# Altium PCB ui_layout-v0.1.1.PcbDoc
Units mil, origin at the board's own origin, x right, y up, seen from the top; angles counter-clockwise.
Board outline 3940 x 1889.76 mil, 2 copper layers (Top Layer, Bottom Layer); 35 components, 47 nets, 127 pads, 34 vias.
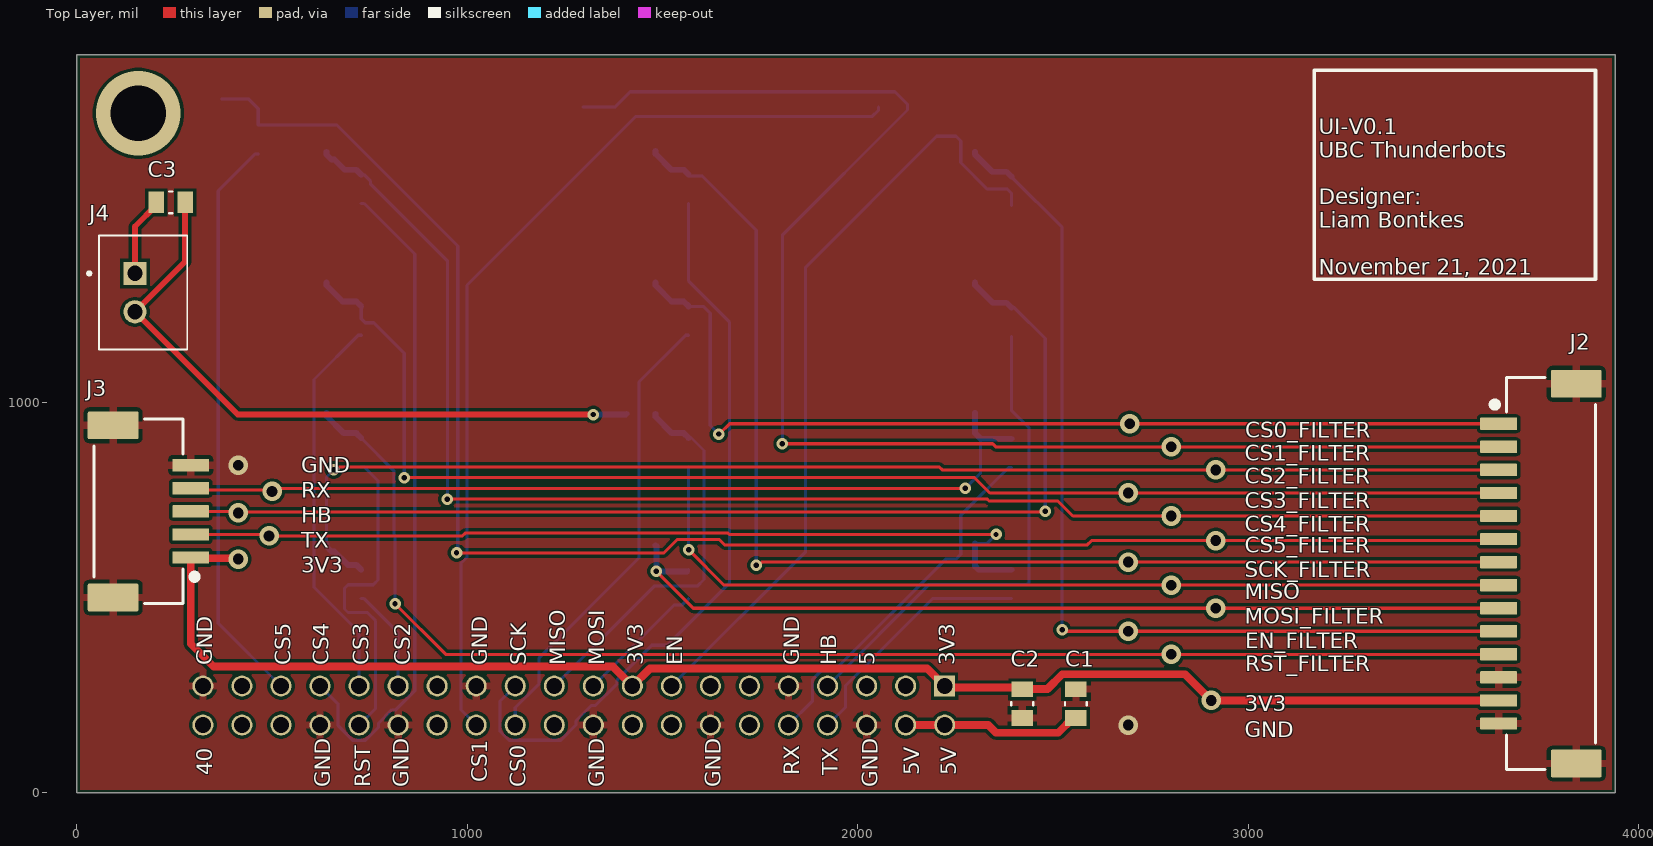
[diagram p0: Top Layer view]
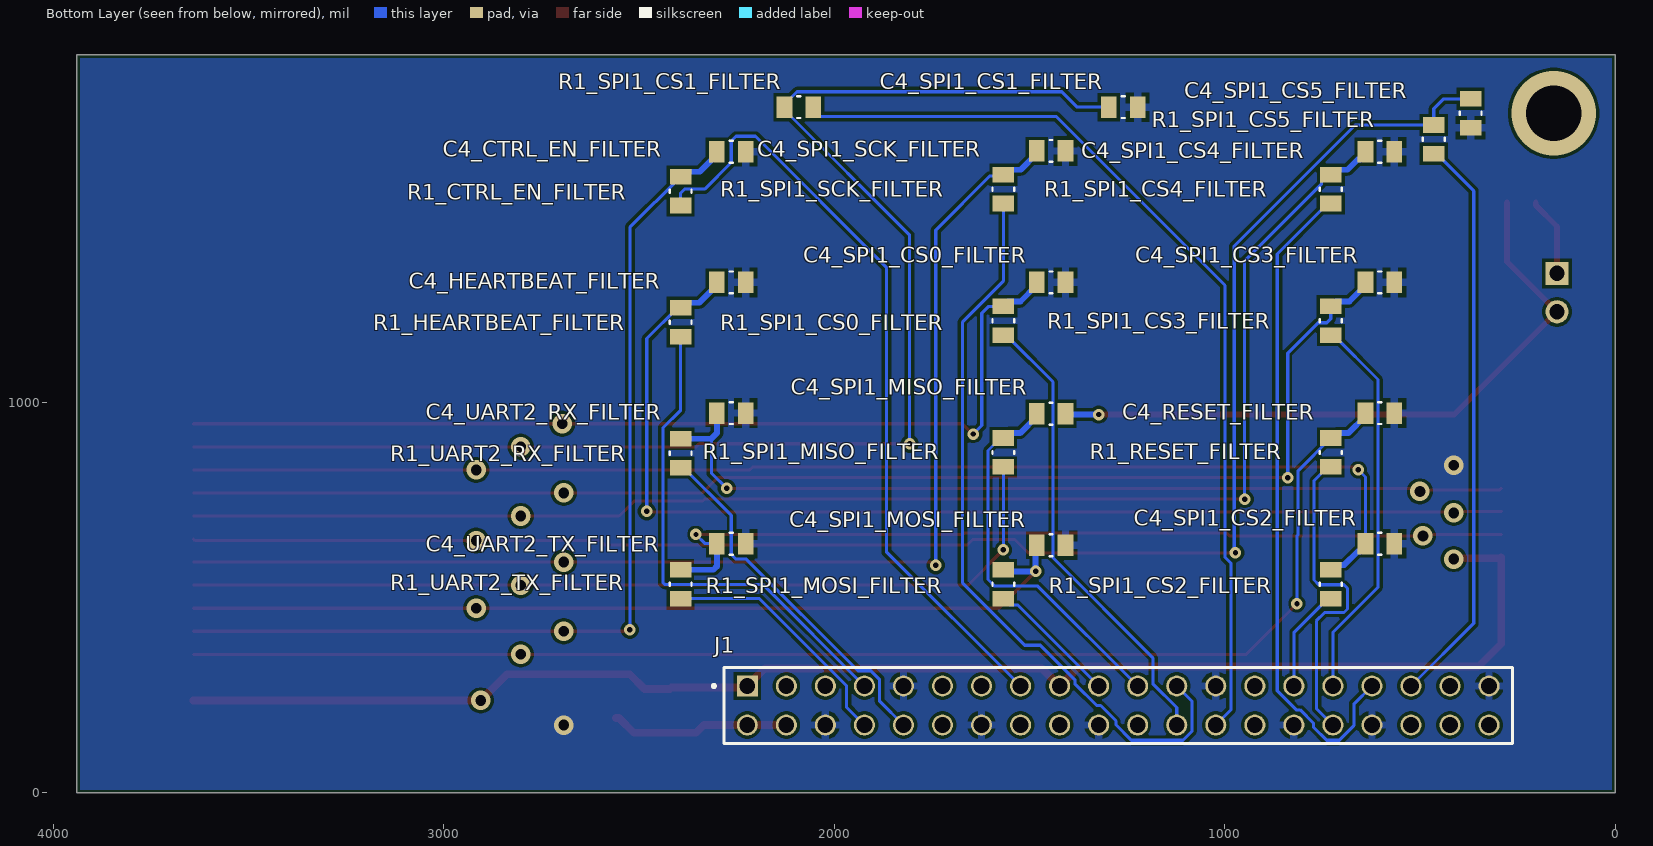
[diagram p1: Bottom Layer view, seen from below]

## Layer stack, top to bottom
Top Solder: solder mask 0.4, Solder Resist, Dk 3.5
Top Layer: signal copper 1.4
Dielectric 1: dielectric 12.6, FR-4, Dk 4.8
Bottom Layer: signal copper 1.4
Bottom Solder: solder mask 0.4, Solder Resist, Dk 3.5

## Board outline
0,0 0,1889.76 3940,1889.76 3940,0

## Design rules (kind name [scope] priority, off if disabled: settings)
BoardOutlineClearance [All] p1: gap=7.87 ignorepadtopadclearanceinfootprint=FALSE except(15.75: Arc-SplitBarrior Arc-SplitContinuation Track-SplitBarrior Track-SplitContinuation SMDPad-SplitBarrior SMDPad-SplitContinuation THPad-SplitBarrior THPad-SplitContinuation Via-SplitBarrior Via-SplitContinuation Fill-SplitBarrior Fill-SplitContinuation Poly-SplitBarrior Poly-SplitContinuation Region-SplitBarrior Region-SplitContinuation Text-SplitBarrior Text-SplitContinuation)
Clearance "Clearance Bottom Layer" [OnLayer('Bottom Layer')] p1: gap=8 ignorepadtopadclearanceinfootprint=TRUE except(10: Arc-Text Track-Text SMDPad-Text THPad-Text Via-Text Fill-Text Poly-Text Region-Text Text-Text)
Clearance "Clearance Top Layer" [OnLayer('Top Layer')] p2: gap=8 ignorepadtopadclearanceinfootprint=TRUE except(10: Arc-Text Track-Text SMDPad-Text THPad-Text Via-Text Fill-Text Poly-Text Region-Text Text-Text)
Clearance [All] p3: gap=7.87 ignorepadtopadclearanceinfootprint=TRUE except(3.5: Arc-Arc Arc-Track Arc-SMDPad Track-Track Track-SMDPad SMDPad-SMDPad; 5: Arc-Via Track-Via SMDPad-Via THPad-Via Via-Via; 10: Arc-Text Track-Text SMDPad-Text THPad-Text Via-Text Fill-Text Poly-Text Region-Text Text-Text)
HoleSize [All] p1: absolutevalues=TRUE maxlimit=248.03 minlimit=7.87 maxpercent=80.000 minpercent=20.000
MinimumAnnularRing [All] p1: minimumring=3
MinimumSolderMaskSliver [All] p1: minsoldermaskwidth=3.94
PolygonConnect PolygonConnect_1 [All] p1: thpad.connectstyle=Relief thpad.reliefconductorwidth=20 thpad.reliefentries=4 thpad.polygonreliefangle="90 Angle" thpad.airgapwidth=10 smdpad.connectstyle=Relief smdpad.reliefconductorwidth=20 smdpad.reliefentries=4 smdpad.polygonreliefangle="90 Angle" smdpad.airgapwidth=10 via.connectstyle=Direct via.reliefconductorwidth=20 via.reliefentries=4 via.polygonreliefangle="90 Angle" via.airgapwidth=10
RoomDefinition SPI1_CS1_FILTER [InComponentClass('SPI1_CS1_FILTER')] p1: confinementstyle=ConfineIn formatcopy=TRUE lockcomponents=FALSE outline 1181.1,1708.66 2169.29,1708.66 2169.29,1803.15 1181.1,1803.15
RoomDefinition SPI1_CS5_FILTER [InComponentClass('SPI1_CS5_FILTER')] p2: confinementstyle=ConfineIn formatcopy=TRUE lockcomponents=FALSE outline 322.83,1594.49 511.81,1594.49 511.81,1818.9 322.83,1818.9
RoomDefinition UART2_TX_FILTER [InComponentClass('UART2_TX_FILTER')] p3: confinementstyle=ConfineIn formatcopy=TRUE lockcomponents=FALSE outline 2185.04,456.69 2440.94,456.69 2440.94,685.04 2185.04,685.04
RoomDefinition UART2_RX_FILTER [InComponentClass('UART2_RX_FILTER')] p4: confinementstyle=ConfineIn formatcopy=TRUE lockcomponents=FALSE outline 2185.04,791.34 2440.94,791.34 2440.94,1019.68 2185.04,1019.68
RoomDefinition U_power [InComponentClass('U_power')] p5: confinementstyle=ConfineIn formatcopy=TRUE lockcomponents=FALSE outline 3.94,440.94 362.2,440.94 362.2,1559.06 3.94,1559.06
RoomDefinition U_motordriver [InComponentClass('U_motordriver')] p6: confinementstyle=ConfineIn formatcopy=TRUE lockcomponents=FALSE outline 3572.68,17.56 3572.68,1104.49 3927.32,1104.49 3927.32,17.56
RoomDefinition U_jetson-nano [InComponentClass('U_jetson-nano')] p7: confinementstyle=ConfineIn formatcopy=TRUE lockcomponents=FALSE outline 240.16,102.36 2606.3,102.36 2606.3,342.52 240.16,342.52
RoomDefinition SPI1_SCK_FILTER [InComponentClass('SPI1_SCK_FILTER')] p8: confinementstyle=ConfineIn formatcopy=TRUE lockcomponents=FALSE outline 1366.14,1468.5 1614.17,1468.5 1614.17,1692.91 1366.14,1692.91
RoomDefinition SPI1_MOSI_FILTER [InComponentClass('SPI1_MOSI_FILTER')] p9: confinementstyle=ConfineIn formatcopy=TRUE lockcomponents=FALSE outline 1366.14,456.69 1614.17,456.69 1614.17,681.1 1366.14,681.1
RoomDefinition SPI1_MISO_FILTER [InComponentClass('SPI1_MISO_FILTER')] p10: confinementstyle=ConfineIn formatcopy=TRUE lockcomponents=FALSE outline 1366.14,791.34 1614.17,791.34 1614.17,1019.68 1366.14,1019.68
RoomDefinition SPI1_CS4_FILTER [InComponentClass('SPI1_CS4_FILTER')] p11: confinementstyle=ConfineIn formatcopy=TRUE lockcomponents=FALSE outline 523.62,1468.5 775.59,1468.5 775.59,1688.98 523.62,1688.98
RoomDefinition SPI1_CS3_FILTER [InComponentClass('SPI1_CS3_FILTER')] p12: confinementstyle=ConfineIn formatcopy=TRUE lockcomponents=FALSE outline 523.62,1129.92 775.59,1129.92 775.59,1354.33 523.62,1354.33
RoomDefinition SPI1_CS2_FILTER [InComponentClass('SPI1_CS2_FILTER')] p13: confinementstyle=ConfineIn formatcopy=TRUE lockcomponents=FALSE outline 523.62,456.69 775.59,456.69 775.59,685.04 523.62,685.04
RoomDefinition SPI1_CS0_FILTER [InComponentClass('SPI1_CS0_FILTER')] p14: confinementstyle=ConfineIn formatcopy=TRUE lockcomponents=FALSE outline 1366.14,1129.92 1614.17,1129.92 1614.17,1354.33 1366.14,1354.33
RoomDefinition RESET_FILTER [InComponentClass('RESET_FILTER')] p15: confinementstyle=ConfineIn formatcopy=TRUE lockcomponents=FALSE outline 523.62,791.34 775.59,791.34 775.59,1019.68 523.62,1019.68
RoomDefinition HEARTBEAT_FILTER [InComponentClass('HEARTBEAT_FILTER')] p16: confinementstyle=ConfineIn formatcopy=TRUE lockcomponents=FALSE outline 2185.04,1125.98 2440.94,1125.98 2440.94,1354.33 2185.04,1354.33
RoomDefinition CTRL_EN_FILTER [InComponentClass('CTRL_EN_FILTER')] p17: confinementstyle=ConfineIn formatcopy=TRUE lockcomponents=FALSE outline 2185.04,1460.63 2440.94,1460.63 2440.94,1688.98 2185.04,1688.98
RoutingCorners [All] p1: cornerstyle=Round minsetback=100 maxsetback=100
RoutingVias [All] p1: holewidth=19.68 width=39.37 viastyle="Through Hole" minholewidth=7.87 minwidth=17.72 maxholewidth=39.37 maxwidth=78.74
SilkToSilkClearance [All] p1: silktosilkclearance=3.94
SilkToSolderMaskClearance [IsPad] p1: minsilkscreentomaskgap=3.94 clearancetoexposedcopper=TRUE
SolderMaskExpansion [All] p1: expansion=4 istentingtop=FALSE
Width [All] p1: maxlimit=100 minlimit=3.5 preferedwidth=15
25 further rules are at their usual default settings.

## Classes and differential pairs
channel class low-pass-filter: CTRL_EN_FILTER HEARTBEAT_FILTER RESET_FILTER SPI1_CS0_FILTER SPI1_CS1_FILTER SPI1_CS2_FILTER SPI1_CS3_FILTER SPI1_CS4_FILTER SPI1_CS5_FILTER SPI1_MISO_FILTER SPI1_MOSI_FILTER SPI1_SCK_FILTER UART2_RX_FILTER UART2_TX_FILTER
component class UART2_TX_FILTER: C4_UART2_TX_FILTER R1_UART2_TX_FILTER
component class UART2_RX_FILTER: C4_UART2_RX_FILTER R1_UART2_RX_FILTER
component class U_power: C3 J3 J4
component class U_motordriver: J2
component class U_jetson-nano: C1 C2 J1
component class SPI1_SCK_FILTER: C4_SPI1_SCK_FILTER R1_SPI1_SCK_FILTER
component class SPI1_MOSI_FILTER: C4_SPI1_MOSI_FILTER R1_SPI1_MOSI_FILTER
component class SPI1_MISO_FILTER: C4_SPI1_MISO_FILTER R1_SPI1_MISO_FILTER
component class SPI1_CS5_FILTER: C4_SPI1_CS5_FILTER R1_SPI1_CS5_FILTER
component class SPI1_CS4_FILTER: C4_SPI1_CS4_FILTER R1_SPI1_CS4_FILTER
component class SPI1_CS3_FILTER: C4_SPI1_CS3_FILTER R1_SPI1_CS3_FILTER
component class SPI1_CS2_FILTER: C4_SPI1_CS2_FILTER R1_SPI1_CS2_FILTER
component class SPI1_CS1_FILTER: C4_SPI1_CS1_FILTER R1_SPI1_CS1_FILTER
component class SPI1_CS0_FILTER: C4_SPI1_CS0_FILTER R1_SPI1_CS0_FILTER
component class RESET_FILTER: C4_RESET_FILTER R1_RESET_FILTER
component class HEARTBEAT_FILTER: C4_HEARTBEAT_FILTER R1_HEARTBEAT_FILTER
component class CTRL_EN_FILTER: C4_CTRL_EN_FILTER R1_CTRL_EN_FILTER

## Components (designator, comment, footprint, x,y, rotation, side; value= is the part's Value field where it differs from the comment)
C1 "0.1uF 25V" 0805 2559.06,228.35 r270 top value=0.1uF
C2 "0.1uF 25V" 0805 2421.26,228.35 r90 top value=0.1uF
C3 "0.1uF 25V" 0805 240.16,1511.81 r180 top value=0.1uF
C4_CTRL_EN_FILTER "100pF 16V" 0805 2263.78,1641.73 r0 bottom value=100pF (schematic designator C4)
C4_HEARTBEAT_FILTER "100pF 16V" 0805 2263.78,1307.08 r0 bottom value=100pF (schematic designator C4)
C4_RESET_FILTER "100pF 16V" 0805 602.36,972.44 r0 bottom value=100pF (schematic designator C4)
C4_SPI1_CS0_FILTER "100pF 16V" 0805 1444.88,1307.09 r0 bottom value=100pF (schematic designator C4)
C4_SPI1_CS1_FILTER "100pF 16V" 0805 1259.84,1755.91 r0 bottom value=100pF (schematic designator C4)
C4_SPI1_CS2_FILTER "100pF 16V" 0805 602.36,637.8 r0 bottom value=100pF (schematic designator C4)
C4_SPI1_CS3_FILTER "100pF 16V" 0805 602.36,1307.09 r0 bottom value=100pF (schematic designator C4)
C4_SPI1_CS4_FILTER "100pF 16V" 0805 602.36,1641.73 r0 bottom value=100pF (schematic designator C4)
C4_SPI1_CS5_FILTER "100pF 16V" 0805 370.08,1740.16 r90 bottom value=100pF (schematic designator C4)
C4_SPI1_MISO_FILTER "100pF 16V" 0805 1444.88,970.47 r0 bottom value=100pF (schematic designator C4)
C4_SPI1_MOSI_FILTER "100pF 16V" 0805 1444.88,633.86 r0 bottom value=100pF (schematic designator C4)
C4_SPI1_SCK_FILTER "100pF 16V" 0805 1444.88,1643.7 r0 bottom value=100pF (schematic designator C4)
C4_UART2_RX_FILTER "100pF 16V" 0805 2263.78,972.44 r0 bottom value=100pF (schematic designator C4)
C4_UART2_TX_FILTER "100pF 16V" 0805 2263.78,637.8 r0 bottom value=100pF (schematic designator C4)
J1 "CN HDR 40POS" "CN HDR 40POS 0.1 TH" 1272.83,223.23 r0 bottom locked
J2 "CN HDR 14POS" "CN HDR 14POS SMD 1.5MM" 3750,561.02 r90 top
J3 "CN HDR 5POS" "CN HDR 5POS SMD 1.5MM" 183.32,720.47 r270 top
J4 "CN HDR 2POS JST XH" JST_B2B-XH-A(LF)(SN) 169.49,1280.92 r270 top
R1_CTRL_EN_FILTER "160" 0805 2393.7,1540.94 r270 bottom value=1 (schematic designator R1)
R1_HEARTBEAT_FILTER "160" 0805 2393.7,1205.28 r270 bottom value=1 (schematic designator R1)
R1_RESET_FILTER "160" 0805 728.35,871.35 r270 bottom value=1 (schematic designator R1)
R1_SPI1_CS0_FILTER "160" 0805 1566.93,1208.72 r270 bottom value=1 (schematic designator R1)
R1_SPI1_CS1_FILTER "160" 0805 2090.55,1755.91 r180 bottom value=1 (schematic designator R1)
R1_SPI1_CS2_FILTER "160" 0805 728.35,533.98 r270 bottom value=1 (schematic designator R1)
R1_SPI1_CS3_FILTER "160" 0805 728.35,1208.72 r270 bottom value=1 (schematic designator R1)
R1_SPI1_CS4_FILTER "160" 0805 728.35,1546.09 r270 bottom value=1 (schematic designator R1)
R1_SPI1_CS5_FILTER "160" 0805 464.57,1673.23 r270 bottom value=1 (schematic designator R1)
R1_SPI1_MISO_FILTER "160" 0805 1566.93,871.35 r270 bottom value=1 (schematic designator R1)
R1_SPI1_MOSI_FILTER "160" 0805 1566.93,533.98 r270 bottom value=1 (schematic designator R1)
R1_SPI1_SCK_FILTER "160" 0805 1566.93,1546.09 r270 bottom value=1 (schematic designator R1)
R1_UART2_RX_FILTER "160" 0805 2393.7,869.63 r270 bottom value=1 (schematic designator R1)
R1_UART2_TX_FILTER "160" 0805 2393.7,533.98 r270 bottom value=1 (schematic designator R1)

## Footprints (in the part's own frame and the unit in brackets; to place one, negate y for a bottom-side part, rotate by r counter-clockwise, add the part's x,y. Pads: shape width x height; smd on the part's side, far side on the other; paste and mask are expansions set on the pad)
0805 [mil]
  rect 40x55 smd: 1(-37,0) 2(37,0)
  silkscreen extent -4,-28 4,28, body extent -47,-28 47,28, height 24
"CN HDR 5POS SMD 1.5MM" [mm] "Connector Header Surface Mount 5 position 0.059\" (1.50mm)"
  rrect10% 1.8x3.3 smd: 0(-5.6,-2.3) 0(5.6,-2.3)
  rrect10% 0.8x2.4 smd: 1(3,2.75) 2(1.5,2.75) 3(0,2.75) 4(-1.5,2.75) 5(-3,2.75)
  silkscreen extent -6,-3.55 6,3, body extent -6,-2.9 6,4.1, height 7.51
"CN HDR 14POS SMD 1.5MM" [mm] "Connector Header Surface Mount 14 position 0.059\" (1.50mm)"
  rrect10% 1.8x3.3 smd: 0(-12.35,-2.3) 0(12.35,-2.3)
  rrect10% 0.8x2.4 smd: 1(9.75,2.75) 2(8.25,2.75) 3(6.75,2.75) 4(5.25,2.75) 5(3.75,2.75) 6(2.25,2.75) 7(0.75,2.75) 8(-0.75,2.75) 9(-2.25,2.75) 10(-3.75,2.75) 11(-5.25,2.75) 12(-6.75,2.75) 13(-8.25,2.75) 14(-9.75,2.75)
  silkscreen extent -12.75,-3.55 12.76,3
"CN HDR 40POS 0.1 TH" [mm] "40 Position Header Connector 0.100\" (2.54mm) Through Hole"
  rect 1.37x1.37 hole 1.02: 01(24.13,-1.27)
  round 1.37 hole 1.02: 02(24.13,1.27) 03(21.59,-1.27) 04(21.59,1.27) 05(19.05,-1.27) 06(19.05,1.27) 07(16.51,-1.27) 08(16.51,1.27) 09(13.97,-1.27) 10(13.97,1.27) 11(11.43,-1.27) 12(11.43,1.27) 13(8.89,-1.27) 14(8.89,1.27) 15(6.35,-1.27) 16(6.35,1.27) 17(3.81,-1.27) 18(3.81,1.27) 19(1.27,-1.27) 20(1.27,1.27) 21(-1.27,-1.27) 22(-1.27,1.27) 23(-3.81,-1.27) 24(-3.81,1.27) 25(-6.35,-1.27) 26(-6.35,1.27) 27(-8.89,-1.27) 28(-8.89,1.27) 29(-11.43,-1.27) 30(-11.43,1.27) 31(-13.97,-1.27) 32(-13.97,1.27) 33(-16.51,-1.27) 34(-16.51,1.27) 35(-19.05,-1.27) 36(-19.05,1.27) 37(-21.59,-1.27) 38(-21.59,1.27) 39(-24.13,-1.27) 40(-24.13,1.27)
  silkscreen extent -25.66,-2.47 26.4,2.47
JST_B2B-XH-A(LF)(SN) [mm]
  rect 1.508x1.508 hole 1: 1(-1.25,-0.525)
  round 1.508 hole 1: 2(1.25,-0.525)
  silkscreen extent -3.7,-3.6 3.7,2.88, body extent -3.7,-2.85 3.7,2.9, height 7.1

## Part data
C1 C2 C3: library part "CAP 0.1uF 25V", "Default Symbol for Capacitors", Operating Temperature="-55°C ~ 125°C", Rating=25V, Temperature Coefficient=X7R, Tolerance=10%, Part Number="CAP 0.1uF 25V"
C4_CTRL_EN_FILTER C4_HEARTBEAT_FILTER C4_RESET_FILTER C4_SPI1_CS0_FILTER C4_SPI1_CS1_FILTER C4_SPI1_CS2_FILTER C4_SPI1_CS3_FILTER C4_SPI1_CS4_FILTER C4_SPI1_CS5_FILTER C4_SPI1_MISO_FILTER C4_SPI1_MOSI_FILTER C4_SPI1_SCK_FILTER C4_UART2_RX_FILTER C4_UART2_TX_FILTER: library part "CAP 100pF 16V", "Default Symbol for Capacitors", Operating Temperature="-55°C ~ 125°C", Rating=16V, Temperature Coefficient=X5R, Tolerance=10%, Part Number="CAP 100pF 16V"
J1: "40 Position Header Connector", Supplier Part Number 1=S6104-ND, Part Number="CN HDR 40POS", Pin Count=40, Supplier 1=Digi-Key, Supplier URL 1=https://www.digikey.ca/en/products/detail/sullins-connector-solutions/PPTC202LFBN-RC/807240?s=N4IgTCBcDaIMoDYCMAGALAWgHIBEQF0BfIA
J2: "Connector Header 14 Position", Supplier Part Number 1=455-4210-1-ND, Part Number="CN HDR 14POS", Pin Count=14, Supplier 1=Digi-Key, Supplier URL 1=https://www.digikey.ca/en/products/detail/jst-sales-america-inc/BM14B-ZESS-TBT-LF-SN/1886998?s=N4IgTCBcDaICwFYEFo5gIwAZnuQOQBEQBdAXyA
J3: "Connector Header 5 Position", Supplier Part Number 1=455-2383-1-ND, Part Number="CN HDR 5POS", Pin Count=5, Supplier 1=Digi-Key, Supplier URL 1=https://www.digikey.ca/en/products/detail/jst-sales-america-inc/BM05B-ZESS-TBT-LF-SN/1886989?s=N4IgTCBcDaICwFYEFowGYAcbkEZkDkAREAXQF8g
J4: "Connector Header Through Hole 2 position 0.098 _2.50mm_ / JST XH", Package=None, MF="JST Sales", MP=B2B-XH-A_LF__SN_, Part Number="CN HDR 2POS JST XH", Pin Count=2, Price=None, SnapEDA_Link=https://www.snapeda.com/parts/B2B-XH-A%28LF%29%28SN%29/JST%20Sales%20America%20Inc./view-part/492310/?ref=snap
R1_CTRL_EN_FILTER R1_HEARTBEAT_FILTER R1_RESET_FILTER R1_SPI1_CS0_FILTER R1_SPI1_CS1_FILTER R1_SPI1_CS2_FILTER R1_SPI1_CS3_FILTER R1_SPI1_CS4_FILTER R1_SPI1_CS5_FILTER R1_SPI1_MISO_FILTER R1_SPI1_MOSI_FILTER R1_SPI1_SCK_FILTER R1_UART2_RX_FILTER R1_UART2_TX_FILTER: library part "RES 160.0 1/8W", "Default Resistor Symbol", Package=0805, Power (Watts)=0.125W, Tolerance=5%, Part Number="RES 160.0 1/8W"

## Via types
v1: diameter 50, hole 27.56, Top Layer to Bottom Layer, 18 vias
v2: diameter 29.53, hole 13.78, Top Layer to Bottom Layer, 15 vias
v3: diameter 216.54, hole 141.73, Top Layer to Bottom Layer, 1 vias

## Nets (pads, with @x,y where several pads share a name; then routed paths per layer and width w, separated by ;. In a path a pad name is that pad's centre, name@x,y a point inside that pad or via, vN(x,y) a via of type N, cw(c..) or ccw(c..) an arc to the next point about the centre after c; other vN are vias at no path point)
CTRL_EN: J1.15 R1_CTRL_EN_FILTER.2 | length 2005.5
  Bottom Layer w8: J1.15 1866.72,617.11 1866.72,1346.14 2201.81,1681.23 2251.75,1681.23 2263.78,1669.2 2263.78,1614.26 2332.11,1545.94 2383.7,1545.94 2393.7,1535.94 R1_CTRL_EN_FILTER.2
CTRL_EN_FILTER: C4_CTRL_EN_FILTER.2 J2.10 R1_CTRL_EN_FILTER.1 | length 2457.9
  Top Layer w8: v2(2523.62,417.32) 2527.56,413.39 v1(2692.91,413.39) J2.10
  Bottom Layer w8: R1_CTRL_EN_FILTER.1 2523.62,1448.01 v2(2523.62,417.32)
  Bottom Layer w15: C4_CTRL_EN_FILTER.2 2300.78,1634.23 2344.58,1590.44 2381.2,1590.44 R1_CTRL_EN_FILTER.1
HEARTBEAT: J1.07 R1_HEARTBEAT_FILTER.2 | length 1275
  Bottom Layer w8: J1.07 2183.27,533.66 2434.51,533.66 2439.2,538.35 2439.2,934.09 2393.7,979.58 R1_HEARTBEAT_FILTER.2
HEARTBEAT_FILTER: C4_HEARTBEAT_FILTER.2 J3.3 R1_HEARTBEAT_FILTER.1 | length 2878.2
  Top Layer w8: J3.3 409.45,720.47 v1(413.39,716.54) 415.35,718.5 2478.35,718.5 v2(2480.32,720.47)
  Bottom Layer w8: R1_HEARTBEAT_FILTER.1 2401.2,1242.28 2480.32,1163.17 v2(2480.32,720.47)
  Bottom Layer w15: C4_HEARTBEAT_FILTER.2 2300.78,1299.59 2345.58,1254.78 2381.2,1254.78 R1_HEARTBEAT_FILTER.1
I2C_1_SCL: J1.28
I2C_1_SDA: J1.27
I2C_2_SCL: J1.05
I2C_2_SDA: J1.03
I2S_4_SCLK: J1.12
I2S_4_SDIN: J1.38
I2S_4_SDOUT: J1.40
JETSON_3V3: C2.2 J1.01 J1.17 J2.13 J3.1 | length 3823.2
  Top Layer w20: v1(413.39,598.43) 411.42,600.39 293.56,600.39 J3.1 291.6,381.63 350.39,322.83 1373.23,322.83 J1.17 1467.8,318.2 2177.87,318.2 J1.01 2226.78,269.29 2417.32,269.29 C2.2 2486.1,265.35 2524.1,303.35 2838.39,303.35 v1(2905.51,236.22) J2.13
JETSON_5V: C1.2 J1.02 J1.04 | length 460.2
  Top Layer w20: J1.04 J1.02 2334.18,173.23 2354.06,153.35 2513.56,153.35 2551.56,191.35 C1.2
JETSON_GND: C1.1 C2.1 C4_CTRL_EN_FILTER.1 C4_HEARTBEAT_FILTER.1 C4_RESET_FILTER.1 C4_SPI1_CS0_FILTER.1 C4_SPI1_CS1_FILTER.1 C4_SPI1_CS2_FILTER.1 C4_SPI1_CS3_FILTER.1 C4_SPI1_CS4_FILTER.1 C4_SPI1_CS5_FILTER.1 C4_SPI1_MOSI_FILTER.1 C4_SPI1_SCK_FILTER.1 C4_UART2_RX_FILTER.1 C4_UART2_TX_FILTER.1 J1.06 J1.09 J1.14 J1.20 J1.25 J1.30 J1.34 J1.39 J2.0 J2.12 J2.14 J3.0 J3.5
  other v1: 2692.91,173.23 413.39,838.58
NetJ2_8: J2.8 R1_SPI1_MISO_FILTER.2 | length 2324.6
  Top Layer w8: v2(1566.93,622.05) 1657.48,531.5 J2.8
  Bottom Layer w8: v2(1566.93,622.05) R1_SPI1_MISO_FILTER.2
  other v1: 2803.15,531.5
POWER_5V: C3.2 J4.1 | length 204.2
  Top Layer w15: J4.1 148.82,1449.97 203.16,1504.31 C3.2
POWER_GND: C3.1 C4_SPI1_MISO_FILTER.1 J4.2 | length 1702.2
  Top Layer w15: C3.1 277.16,1360.05 J4.2 412.02,968.5 v2(1322.83,968.5)
  Bottom Layer w15: v2(1322.83,968.5) 1405.91,968.5 C4_SPI1_MISO_FILTER.1
RESET: J1.32 R1_RESET_FILTER.2 | length 836.5
  Bottom Layer w8: J1.32 765.3,215.7 765.3,439.94 743.77,461.48 694.43,461.48 685.35,470.56 685.35,523.4 694.43,532.48 759.27,532.48 771.35,544.56 771.35,798.85 735.85,834.35 R1_RESET_FILTER.2
RESET_FILTER: C4_RESET_FILTER.2 J2.11 R1_RESET_FILTER.1 | length 3460.5
  Top Layer w8: v2(814.96,484.25) 944.88,354.33 v1(2803.15,354.33) J2.11
  Bottom Layer w8: R1_RESET_FILTER.1 811.82,824.87 811.82,661.11 814.96,657.96 v2(814.96,484.25)
  Bottom Layer w15: C4_RESET_FILTER.2 639.36,964.94 683.46,920.85 715.85,920.85 R1_RESET_FILTER.1
SPI_1_CS0: J1.24 R1_SPI1_CS0_FILTER.2 | length 1186.8
  Bottom Layer w8: J1.24 1122.83,218.12 1183.87,279.15 1183.87,345.37 1439.88,601.39 1439.88,1052.17 1559.43,1171.72 R1_SPI1_CS0_FILTER.2
SPI_1_CS0_FILTER: C4_SPI1_CS0_FILTER.2 J2.1 R1_SPI1_CS0_FILTER.1 | length 2504.4
  Top Layer w8: v2(1644.41,918.58) 1645.73,918.58 1672.03,944.88 v1(2696.85,944.88) J2.1
  Bottom Layer w8: R1_SPI1_CS0_FILTER.1 1604.68,1245.72 1622.43,1227.97 1622.43,940.56 v2(1644.41,918.58)
  Bottom Layer w15: C4_SPI1_CS0_FILTER.2 1481.88,1299.59 1523.25,1258.22 1554.43,1258.22 R1_SPI1_CS0_FILTER.1
SPI_1_CS1: J1.26 R1_SPI1_CS1_FILTER.2 | length 2396.6
  Bottom Layer w8: J1.26 983.87,212.2 983.87,587.75 999.2,603.09 999.2,1299.5 1432.12,1732.41 2037.55,1732.41 2053.55,1748.41 R1_SPI1_CS1_FILTER.2
SPI_1_CS1_FILTER: C4_SPI1_CS1_FILTER.2 J2.2 R1_SPI1_CS1_FILTER.1 | length 3700.7
  Top Layer w8: v2(1807.09,893.7) 2345.57,893.7 2353.45,885.83 v1(2803.15,885.83) J2.2
  Bottom Layer w8: C4_SPI1_CS1_FILTER.2 1377.95,1755.91 1417.45,1795.41 2095.55,1795.41 2127.55,1763.41 R1_SPI1_CS1_FILTER.1 2127.55,1748.41 1807.09,1427.94 v2(1807.09,893.7)
SPI_1_CS2: J1.29 R1_SPI1_CS2_FILTER.2 | length 267.3
  Bottom Layer w8: R1_SPI1_CS2_FILTER.2 735.85,496.98 822.83,409.99 J1.29
SPI_1_CS2_FILTER: C4_SPI1_CS2_FILTER.2 J2.3 R1_SPI1_CS2_FILTER.1 | length 3307.7
  Top Layer w8: v2(657.48,826.77) 663.31,826.77 670.38,833.85 2209.45,833.85 2216.53,826.77 v1(2917.32,826.77) J2.3
  Bottom Layer w8: C4_SPI1_CS2_FILTER.2 639.36,808.65 v2(657.48,826.77)
  Bottom Layer w15: C4_SPI1_CS2_FILTER.2 639.36,630.3 651.86,617.8 659.36,617.8 693.68,583.48 715.85,583.48 R1_SPI1_CS2_FILTER.1
SPI_1_CS3: J1.31 R1_SPI1_CS3_FILTER.2 | length 1000.8
  Bottom Layer w8: J1.31 722.83,410.44 607.36,525.91 607.36,1058.23 720.85,1171.72 R1_SPI1_CS3_FILTER.2
SPI_1_CS3_FILTER: C4_SPI1_CS3_FILTER.2 J2.4 R1_SPI1_CS3_FILTER.1 | length 3435.7
  Top Layer w8: v2(838.58,807.09) 2299.21,807.09 2338.58,767.72 v1(2692.91,767.72) J2.4
  Bottom Layer w8: R1_SPI1_CS3_FILTER.1 728.35,1213.72 738.35,1203.72 760.82,1203.72 838.58,1125.95 v2(838.58,807.09)
  Bottom Layer w15: C4_SPI1_CS3_FILTER.2 639.36,1299.59 680.73,1258.22 715.85,1258.22 R1_SPI1_CS3_FILTER.1
SPI_1_CS4: J1.33 R1_SPI1_CS4_FILTER.2 | length 1700.3
  Bottom Layer w8: J1.33 669.16,226.9 669.16,171.79 706.69,134.26 738.98,134.26 772.83,168.12 772.83,178.34 806.69,212.2 816.91,212.2 865.35,260.63 865.35,1379.59 735.85,1509.09 R1_SPI1_CS4_FILTER.2
SPI_1_CS4_FILTER: C4_SPI1_CS4_FILTER.2 J2.5 R1_SPI1_CS4_FILTER.1 | length 3755.4
  Top Layer w8: v2(948.82,751.97) 2331.7,751.97 2336.44,747.24 2512.61,747.24 2551.18,708.66 J2.5
  Bottom Layer w8: R1_SPI1_CS4_FILTER.1 735.85,1583.09 751.85,1567.09 751.85,1559.59 948.82,1362.61 v2(948.82,751.97)
  Bottom Layer w15: C4_SPI1_CS4_FILTER.2 639.36,1634.23 651.86,1621.73 659.36,1621.73 685.51,1595.59 715.85,1595.59 R1_SPI1_CS4_FILTER.1
  other v1: 2803.15,708.66
SPI_1_CS5: J1.35 R1_SPI1_CS5_FILTER.2 | length 1476.3
  Bottom Layer w8: R1_SPI1_CS5_FILTER.2 457.07,1636.23 362.2,1541.37 362.2,433.86 J1.35
SPI_1_CS5_FILTER: C4_SPI1_CS5_FILTER.2 J2.6 R1_SPI1_CS5_FILTER.1 | length 4269.2
  Top Layer w8: v2(972.44,614.17) 1503.94,614.17 1538.57,648.81 1644.59,648.81 1658.75,634.65 2587.85,634.65 2598.87,645.67 3637.8,645.67 J2.6
  Bottom Layer w8: C4_SPI1_CS5_FILTER.2 439.38,1777.16 464.57,1751.97 R1_SPI1_CS5_FILTER.1 665.67,1710.23 975.58,1400.32 975.58,617.32 v2(972.44,614.17)
  other v1: 2917.32,645.67
SPI_1_MISO: C4_SPI1_MISO_FILTER.2 J1.21 R1_SPI1_MISO_FILTER.1 | length 994.9
  Bottom Layer w8: J1.21 1478.58,528.98 1589.4,528.98 1606.43,546.01 1606.43,876.35 1574.43,908.35 R1_SPI1_MISO_FILTER.1
  Bottom Layer w15: C4_SPI1_MISO_FILTER.2 1481.88,962.97 1524.01,920.85 1554.43,920.85 R1_SPI1_MISO_FILTER.1
SPI_1_MOSI: J1.19 R1_SPI1_MOSI_FILTER.2 | length 336.8
  Bottom Layer w8: J1.19 1530.58,480.98 1550.93,480.98 R1_SPI1_MOSI_FILTER.2
SPI_1_MOSI_FILTER: C4_SPI1_MOSI_FILTER.2 J2.9 R1_SPI1_MOSI_FILTER.1 | length 2348.9
  Top Layer w8: v2(1484.25,566.93) 1578.74,472.44 v1(2917.32,472.44) J2.9
  Bottom Layer w8: R1_SPI1_MOSI_FILTER.1@1562.88,566.93 R1_SPI1_MOSI_FILTER.1
  Bottom Layer w15: C4_SPI1_MOSI_FILTER.2 1484.25,631.49 v2(1484.25,566.93) R1_SPI1_MOSI_FILTER.1@1562.88,566.93
SPI_1_SCK: J1.23 R1_SPI1_SCK_FILTER.2 | length 1923.3
  Bottom Layer w8: J1.23 1083.87,234.26 1083.87,157.09 1106.69,134.26 1238.98,134.26 1278.35,173.63 1278.35,183.85 1317.72,223.23 1327.94,223.23 1383.87,279.15 1383.87,289.37 1472.15,377.66 1512.08,377.66 1671.18,536.75 1671.18,1205.94 1566.93,1310.19 R1_SPI1_SCK_FILTER.2
SPI_1_SCK_FILTER: C4_SPI1_SCK_FILTER.2 J2.7 R1_SPI1_SCK_FILTER.1 | length 3105.8
  Top Layer w8: v2(1740.16,582.68) 1745.98,582.68 1753.86,590.55 v1@2688.98,590.55 ; v1(2692.91,590.55) J2.7
  Bottom Layer w8: R1_SPI1_SCK_FILTER.1 1570.65,1579.36 1601.74,1579.36 1740.16,1440.94 v2(1740.16,582.68)
  Bottom Layer w15: C4_SPI1_SCK_FILTER.2 1481.88,1636.2 1522.5,1595.59 1554.43,1595.59 R1_SPI1_SCK_FILTER.1
SPI_2_CS0: J1.18
SPI_2_CS1: J1.16
SPI_2_MISO: J1.22
SPI_2_MOSI: J1.37
SPI_2_SCK: J1.13
UART_2_CTS: J1.36
UART_2_RTS: J1.11
UART_2_RX: J1.10 R1_UART2_RX_FILTER.2 | length 934.8
  Bottom Layer w8: J1.10 1883.87,234.26 1883.87,289.37 1906.69,312.2 1939.18,312.2 2225.27,598.29 2251.75,598.29 2263.78,610.32 2263.78,710.21 2386.2,832.63 R1_UART2_RX_FILTER.2
UART_2_RX_FILTER: C4_UART2_RX_FILTER.2 J3.4 R1_UART2_RX_FILTER.1 | length 2284.3
  Top Layer w8: J3.4 295.53,775.59 496.06,775.59 v1(500,771.65) 507.08,778.73 2274.8,778.73 v2(2275.59,779.53)
  Bottom Layer w8: v2(2275.59,779.53) 2314.96,818.9 2314.96,906.63
  Bottom Layer w15: C4_UART2_RX_FILTER.2 2300.78,920.81 2314.96,906.63 R1_UART2_RX_FILTER.1
UART_2_TX: J1.08 R1_UART2_TX_FILTER.2 | length 637.2
  Bottom Layer w8: J1.08 1969.16,219.55 1969.16,274.66 2191.47,496.98 R1_UART2_TX_FILTER.2
UART_2_TX_FILTER: C4_UART2_TX_FILTER.2 J3.2 R1_UART2_TX_FILTER.1 | length 2286.7
  Top Layer w8: J3.2 488.19,661.42 v1(492.13,657.48) 987.39,657.48 994.72,664.81 1667.86,664.81 1671.25,661.42 v2(2354.33,661.42)
  Bottom Layer w8: C4_UART2_TX_FILTER.2 2330.71,637.79 v2(2354.33,661.42)
  Bottom Layer w15: C4_UART2_TX_FILTER.2 2300.78,579.76 2309.57,570.98 R1_UART2_TX_FILTER.1
copper on no net:
  other v3: 157.48,1740.16

## Polygon pours and split planes (outlines as drawn)
JETSON_GND on Top Layer "JETSON_GND_L01_P000" (solid, pour order 0): 0,0 0,2366.14 3940.94,2366.14 3940.94,0
JETSON_GND on Bottom Layer "JETSON_GND_L02_P001" (solid, pour order 1): 0,0 0,2366.14 3940.94,2366.14 3940.94,0

## Silkscreen, mask and mechanical layers (free items; w line width, h text height)
Top Overlay:
  lines w10: 3169.29,1314.96 3889.76,1314.96 3889.76,1850.39 3169.29,1850.39 3169.29,1314.96
  text "UI-V0.1 / UBC Thunderbots /  / Designer: / Liam Bontkes /  / November 21, 2021" at 3181.1,1326.77 h40
  text "CS0_FILTER" at 2992.13,909.45 h40
  text "CS1_FILTER" at 2990.97,850.39 h40
  text "GND" at 574.8,818.9 h40
  text "CS2_FILTER" at 2990.97,791.34 h40
  text "RX" at 574.8,754.92 h40
  text "CS3_FILTER" at 2990.97,728.35 h40
  text "HB" at 574.8,690.94 h40
  text "CS4_FILTER" at 2990.97,668.71 h40
  text "TX" at 574.8,626.97 h40
  text "CS5_FILTER" at 2990.97,614.17 h40
  text "3V3" at 574.8,562.99 h40
  text "SCK_FILTER" at 2990.97,551.18 h40
  text "MISO" at 2990.97,496.06 h40
  text "MOSI_FILTER" at 2990.97,432.49 h40
  text "EN_FILTER" at 2992.13,370.08 h40
  text "GND" at 346.46,326.77 h40 r90
  text "CS5" at 547.24,326.77 h40 r90
  text "CS4" at 645.67,326.77 h40 r90
  text "CS3" at 748.03,326.77 h40 r90
  text "CS2" at 854.33,326.77 h40 r90
  text "GND" at 1051.18,326.77 h40 r90
  text "SCK" at 1151.18,326.77 h40 r90
  text "MISO" at 1251.18,326.77 h40 r90
  text "MOSI" at 1351.18,326.77 h40 r90
  text "3V3" at 1451.18,326.77 h40 r90
  text "EN" at 1551.18,326.77 h40 r90
  text "GND" at 1850.39,326.77 h40 r90
  text "HB" at 1944.88,326.77 h40 r90
  text "5" at 2043.31,326.77 h40 r90
  text "3V3" at 2248.03,326.77 h40 r90
  text "RST_FILTER" at 2992.13,311.02 h40
  text "3V3" at 2990.97,208.66 h40
  text "GND" at 2990.97,141.73 h40
  text "40" at 346.46,44.99 h40 r90
  text "RX" at 1850.39,44.99 h40 r90
  text "TX" at 1948.82,44.99 h40 r90
  text "5V" at 2157.48,44.99 h40 r90
  text "5V" at 2251.97,44.99 h40 r90
  text "CS1" at 1051.18,26.66 h40 r90
  text "GND" at 649.61,13.33 h40 r90
  text "RST" at 751.97,13.33 h40 r90
  text "GND" at 850.39,13.33 h40 r90
  text "CS0" at 1149.61,13.33 h40 r90
  text "GND" at 1350.39,13.33 h40 r90
  text "GND" at 1649.61,13.33 h40 r90
  text "GND" at 2051.18,13.33 h40 r90
Mechanical 1:
  the board outline again, w10